# Altium PCB 震动.PcbDoc
Units mil, origin at the board's own origin, x right, y up, seen from the top; angles counter-clockwise.
Board outline 6000 x 4000 mil, 2 copper layers (Top Layer, Bottom Layer); 14 components, 7 nets, 35 pads, 4 vias.
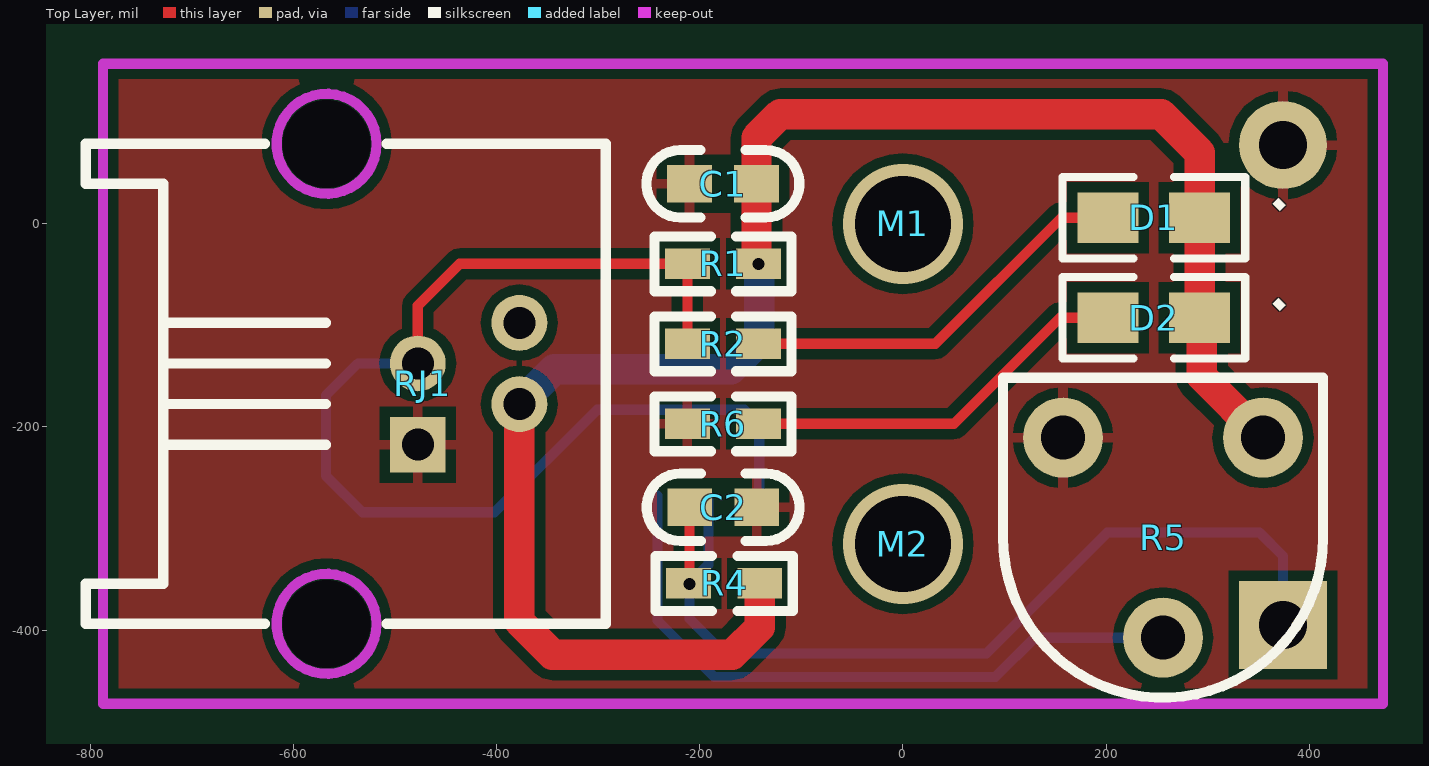
[diagram p0: Top Layer view]
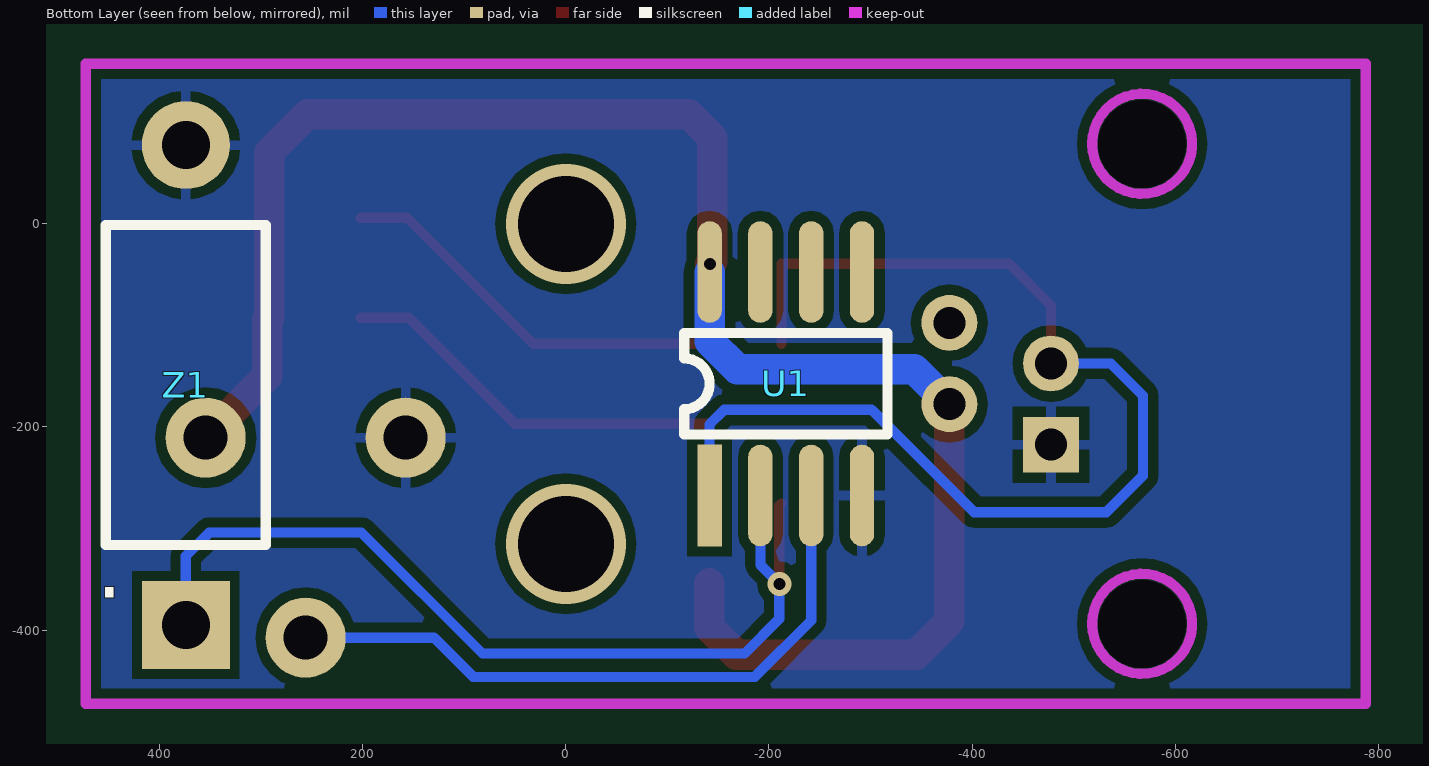
[diagram p1: Bottom Layer view, seen from below]

## Layer stack, top to bottom
Top Solder: solder mask 0.4, Solder Resist, Dk 3.5
Top Layer: signal copper 1.4
Dielectric 1: dielectric 12.6, FR-4, Dk 4.8
Bottom Layer: signal copper 1.4
Bottom Solder: solder mask 0.4, Solder Resist, Dk 3.5

## Board outline
-2937.01,-2464.57 3062.99,-2464.57 3062.99,1535.43 -2937.01,1535.43

## Design rules (kind name [scope] priority, off if disabled: settings)
Clearance [All] p1: gap=10
PolygonConnect [All] p1: connectstyle=Relief reliefconductorwidth=10 reliefentries=4 polygonreliefangle="90 Angle" airgapwidth=10
RoutingVias [All] p1: holewidth=28 width=50 viastyle="Through Hole" minholewidth=28 minwidth=50 maxholewidth=28 maxwidth=50
SolderMaskExpansion [All] p1: expansion=4
Width [All] p1: maxlimit=178.74 minlimit=10 preferedwidth=10
29 further rules are at their usual default settings.

## Components (designator, comment, footprint, x,y, rotation, side; value= is the part's Value field where it differs from the comment)
C1 "Cap" 0603_C -177.17,39.37 r270 top
C2 "Cap" 0603_C -177,-279 r90 top
D1 "LED" 0805 246.91,6 r90 top
D2 "LED" 0805 246.91,-92.43 r90 top
M1 "M2" M2 0,0 r0 top
M2 "M2" M2 0,-314.96 r0 top
R1 "Res2" 0603_R -177.17,-39.37 r90 top
R2 "Res2" 0603_R -177.17,-118.11 r90 top
R4 "Res2" 0603_R -176,-354 r90 top
R5 "RPot" 电位器 256,-309 r0 top
R6 "Res2" 0603_R -177.17,-196.85 r90 top
RJ1 "RJ11" RJ11 -472.44,-157.48 r90 top
U1 "LM393" SO-8 -216.54,-157.48 r0 bottom
Z1 "震动传感器" 震动传感器 374,-395 r90 bottom

## Footprints (in the part's own frame and the unit in brackets; to place one, negate y for a bottom-side part, rotate by r counter-clockwise, add the part's x,y. Pads: shape width x height; smd on the part's side, far side on the other; paste and mask are expansions set on the pad)
0603_C [mil]
  rect 37x44 smd: 1(0,-33) 2(0,33)
  silkscreen extent -33,-75 33,75
0603_R [mil]
  rect 30x44 smd: 1(0,35) 2(0,-35)
  silkscreen extent -27,-67 27,68, body extent -19,-52 20,50, height 21
0805 [mil]
  rect 50x60 smd: 1(0,-45) 2(0,45)
  silkscreen extent -40,-90 40,90
M2 [mil]
RJ11 [mm]
  round 2.1 hole 2.2 unplated: 0(-6,2.41) 0(6,2.41)
  rect 1.397x1.397 hole 0.8: 1(-1.524,0.13)
  round 1.397 hole 0.8: 2(-0.508,-2.41) 3(0.508,0.13) 4(1.524,-2.41)
  Keep-Out Layer circle w0.254: c6,2.41 r1.25
  Keep-Out Layer circle w0.254: c-6,2.41 r1.25
  silkscreen extent -6,-4.57 6,8.43
SO-8 [mil]
  rect 24x100 smd: 1(75,110)
  oval 24x100 smd: 2(25,110) 3(-25,110) 4(-75,110) 5(-75,-110) 6(-25,-110) 7(25,-110) 8(75,-110)
  silkscreen extent -100,-50 100,50
电位器 [mm]
  round 2 hole 1.1: 1(-2.5,2.5) 2(2.5,2.5) 3(0,-2.5)
  silkscreen extent -4,-4 4,4
震动传感器 [mm]
  rect 2.2x2.2 hole 1.2: 1(0,0)
  round 2.2 hole 1.2: 2(12,0)
  silkscreen extent 2,-2 10,2

## Part data
C1 C2: "Capacitor"
D1 D2: library part LED1, "Typical RED GaAs LED"
M1 M2: library part M3
R1 R2 R4 R6: "Resistor"
R5: "Potentiometer"

## Via types
v1: diameter 118.11, hole 94.49, Top Layer to Bottom Layer, 2 vias
v2: diameter 23.62, hole 11.81, Top Layer to Bottom Layer, 2 vias

## Nets (pads, with @x,y where several pads share a name; then routed paths per layer and width w, separated by ;. In a path a pad name is that pad's centre, name@x,y a point inside that pad or via, vN(x,y) a via of type N, cw(c..) or ccw(c..) an arc to the next point about the centre after c; other vN are vias at no path point)
A+: R5.3 U1.3 | length 659.5
  Bottom Layer w10: U1.3 -241.54,-390.46 -186,-446 91,-446 129.57,-407.43 R5.3
A-: C2.2 R4.1 U1.2 Z1.1 | length 933.8
  Top Layer w10: C2.2@-212.17,-275.59 -210.17,-277.59 v2(-210.17,-354.33)
  Bottom Layer w10: U1.2 -191.54,-335.7 v2(-210.17,-354.33) -210.17,-388.83 -176,-423 82,-423 201,-304 351,-304 374,-327 Z1.1
GND: C1.1 C2.1 R5.1 R6.1 RJ1.1 U1.4 Z1.2
NetD1_2: D1.2 R2.2 | length 395.5
  Top Layer w10: R2.2 31.89,-118.11 156,6 D1.2
NetD2_2: D2.2 R6.2 | length 387.3
  Top Layer w10: R6.2 50.15,-196.85 154.57,-92.43 D2.2
OUT_A: R1.1 R2.1 RJ1.3 U1.1 | length 1159.8
  Top Layer w10: RJ1.3 -477.56,-80.56 -436.37,-39.37 R1.1 R2.1
  Bottom Layer w10: RJ1.3 -536.48,-137.48 -568,-169 -568,-248 -532,-284 -402,-284 -301,-183 -156,-183 -141.54,-197.46 U1.1
VCC: C1.2 D1.1 D2.1 R1.2 R4.2 R5.2 RJ1.2 U1.8 | length 1740.9
  Top Layer w30: RJ1.2 -377.56,-391.44 -345,-424 -168,-424 -141,-397 R4.2 ; v2(-142.17,-39.37) -144.17,-37.37 C1.2 -144.17,84.83 -121,108 254,108 291.91,70.09 D1.1 D2.1 294,-94.52 294,-150.15 R5.2
  Bottom Layer w30: RJ1.2 -343.08,-143 -169,-143 -141.54,-115.54 U1.8
pads on no net: RJ1.0 RJ1.4 U1.5 U1.6 U1.7
copper on no net:
  other v1: 0,-314.96 0,0

## Polygon pours and split planes (outlines as drawn)
GND on Top Layer "Top Layer-No Net" (solid, remove dead copper, pour order 11): -814,203 523,203 542,184 533,175 533,-522 -793,-522 -813,-502
GND on Bottom Layer "Top Layer-No Net" (solid, remove dead copper, pour order 13): -837,190 -827,180 537,180 537,-537 521,-553 498,-530 -816,-530

## Keep-outs
Keep-Out Layer:
  lines w10: -787.4,-472.44 472.44,-472.44 472.44,157.48 -787.4,157.48 -787.4,-472.44

## Silkscreen, mask and mechanical layers (free items; w line width, h text height)
Top Overlay:
  text "." at 365.02,6 h60 r45
  text "." at 365.02,-92.43 h60 r45
Bottom Overlay:
  text "." at 436,-368 h60

## Text inside footprints (layer, text, board x,y; h text height)
RJ1: Mechanical 1 "4" at -748.11,-97.48 h39.37 r270; Mechanical 1 "1" at -748.11,-237.48 h39.37 r270; Mechanical 1 "4" at -348.11,-107.48 h39.37 r270; Mechanical 1 "3" at -568.11,-147.48 h39.37 r270; Mechanical 1 "2" at -348.11,-187.48 h39.37 r270; Mechanical 1 "1" at -568.11,-227.48 h39.37 r270